# EAGLE board NanoLite_Panelize (EAGLE 6.3), part 1 of 2
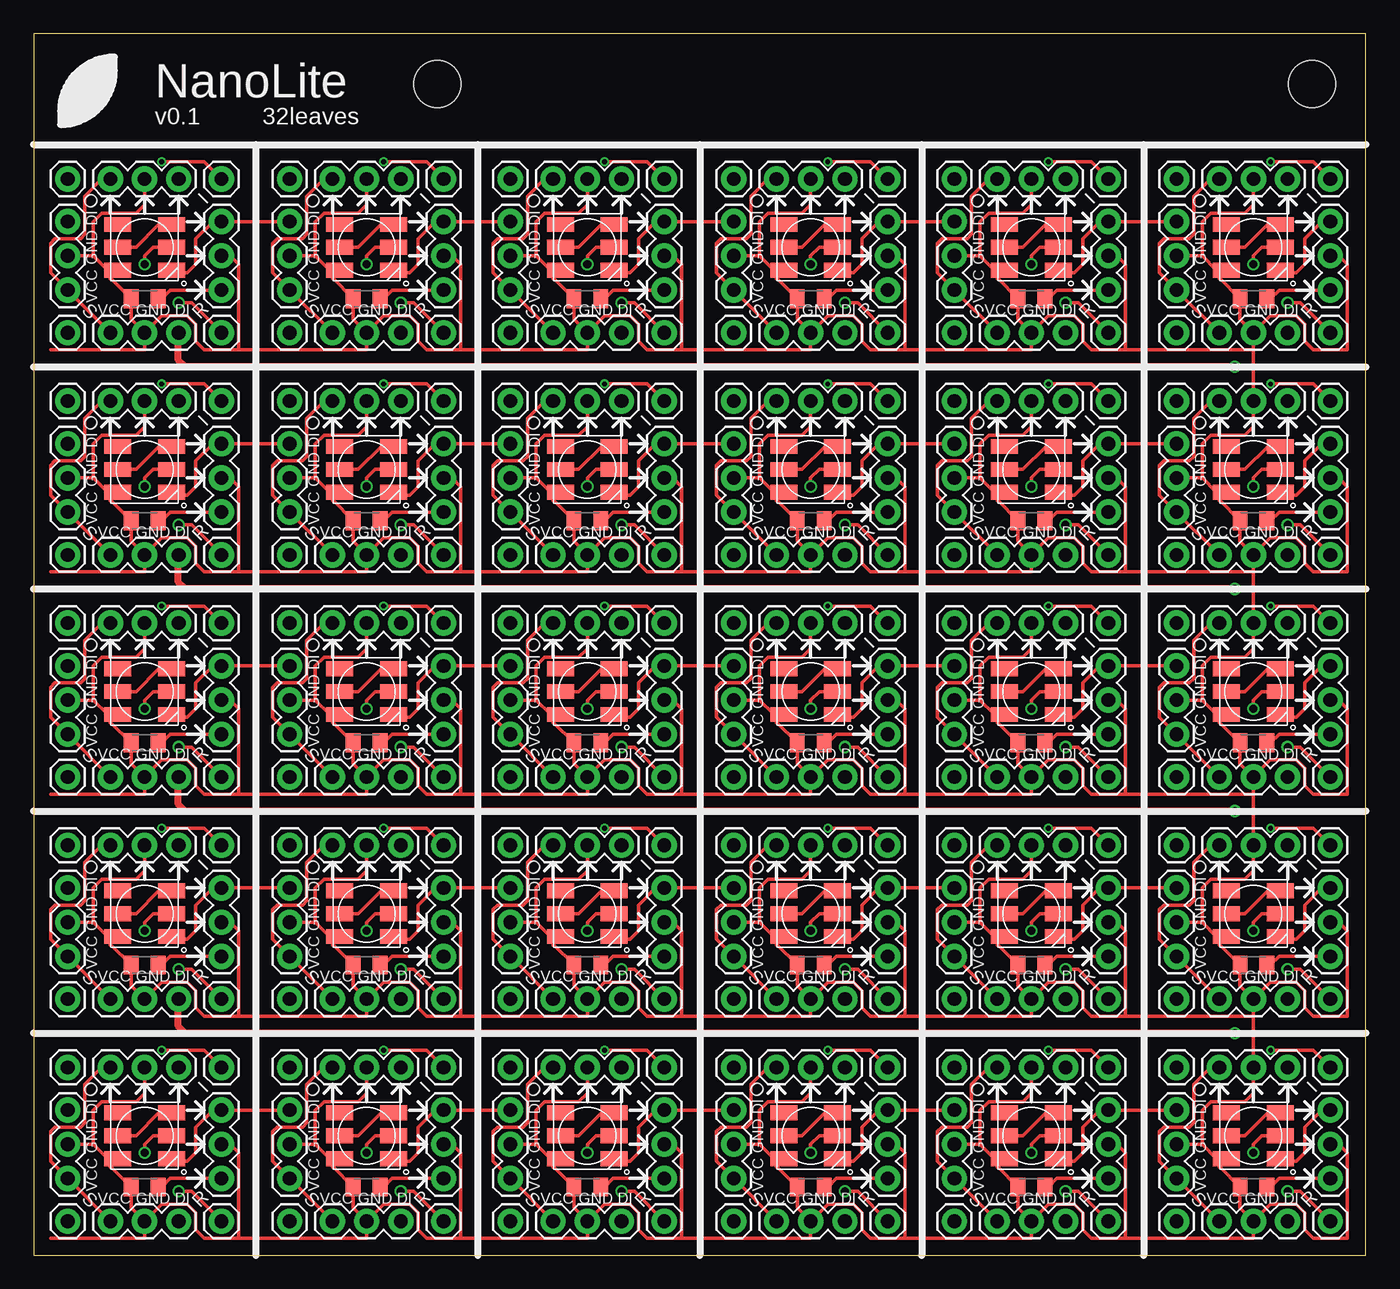
[diagram p0: board, top side]
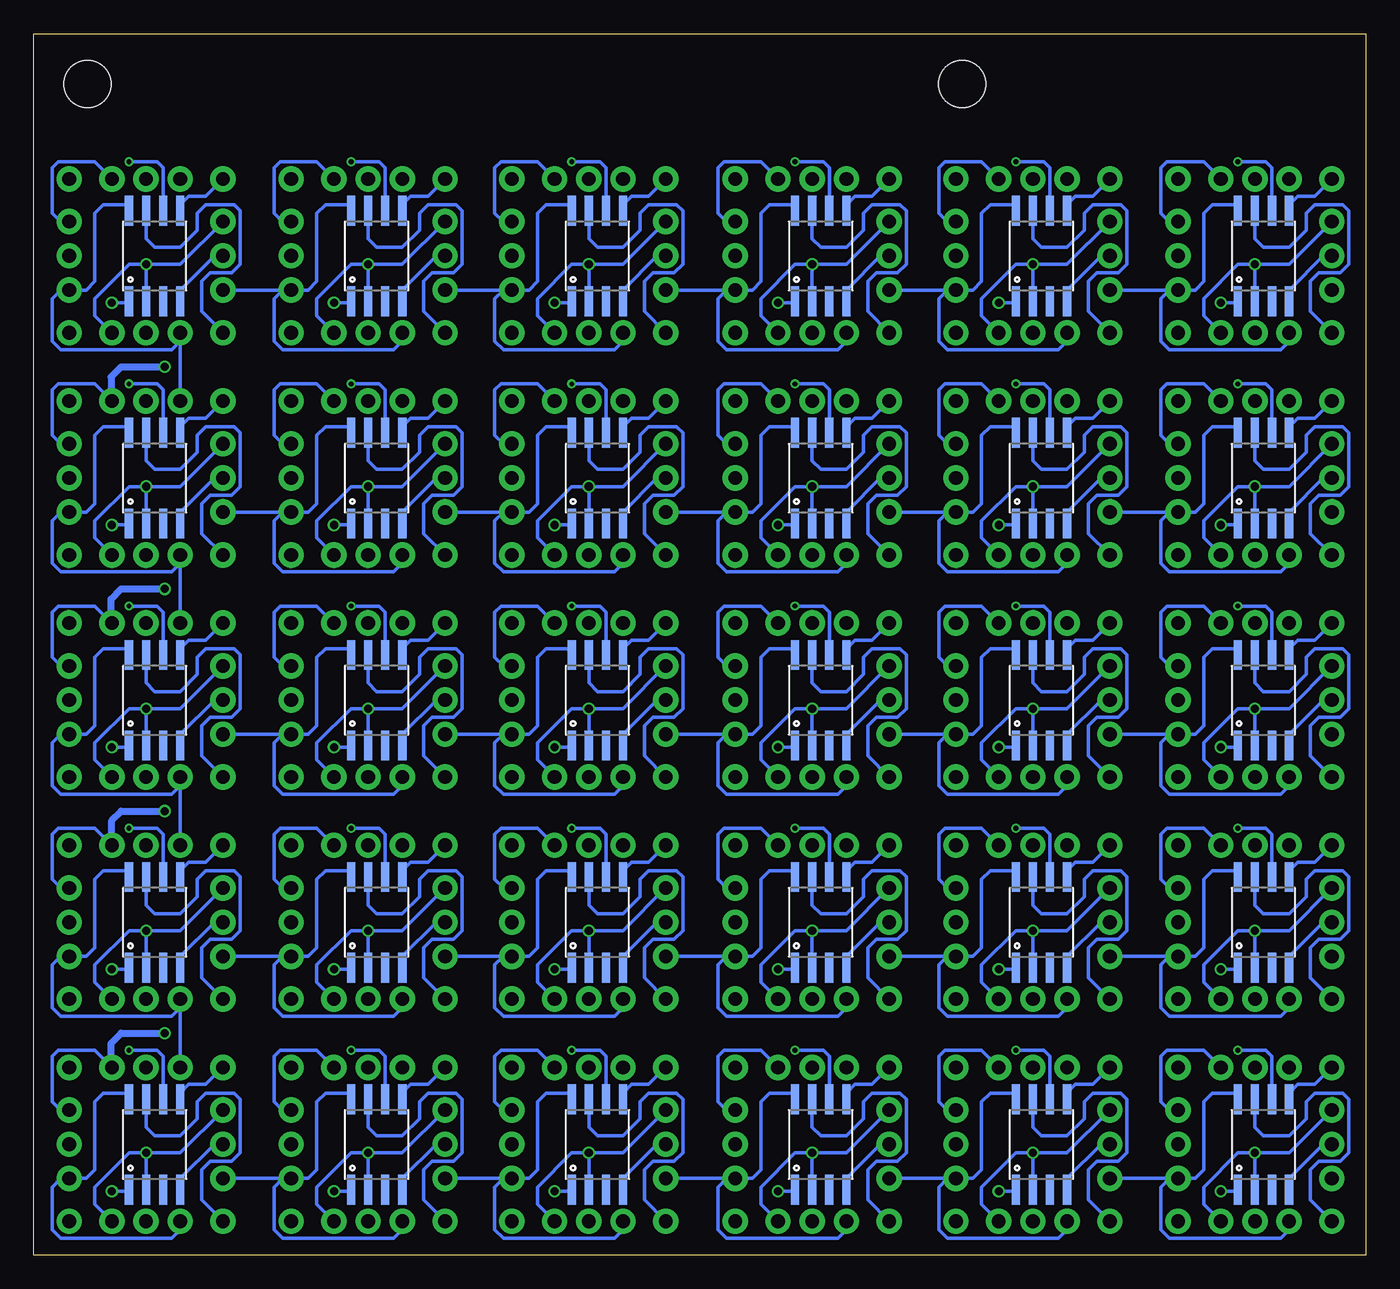
[diagram p1: board, bottom side, seen from below]

Size 99 x 90.75 mm. Coordinates in mm from the lower left corner, seen from the top.
Outline: 0,0 99,0 99,90.75 0,90.75 0,0
Copper layers (1*2*15*16): Top 0.035mm / dielectric 0.2mm / layer 2 0.0175mm / dielectric 1.1mm / layer 15 0.0175mm / dielectric 0.2mm / Bottom 0.035mm
Design rules "SeeedStudio_DRU_no_angle_20130527": minimum track width 6mil, minimum drill 12mil, track to track 6mil, track to pad 6mil, pad to pad 6mil, via to via 6mil, smd to smd 0mil, copper to edge 10mil, drill to drill 10mil, minimum pad ring 6mil, minimum via ring 6mil, stop-mask expansion 2mil, vias tented up to drill 25mil, thermal gap 10mil
Holes 3.5 mm at 95,87 30,87

## Footprints (pad centres in the part's own frame; a part is rotated, then mirrored left to right if it is on the bottom)
1X03 = drill 1.016 pad 1.88: 1 0,0; 2 2.54,0; 3 5.08,0
C0805K = smd 1.1 x 1.4: 1 -1,0; 2 1,0
WS28115050 = smd 2 x 1.1: DI 2,0; DO 2,-1.7; LEDVDD -2,0; NC -2,1.7; VDD 2,1.7; VSS -2,-1.7
1X01 = drill 1.016 pad 1.88: 1 0,0
SO08-EIAJ = smd 0.61 x 2.21: 1 -1.905,-3.378; 2 -0.635,-3.378; 3 0.635,-3.378; 4 1.905,-3.378; 5 1.905,3.353; 6 0.635,3.353; 7 -0.635,3.353; 8 -1.905,3.353

## Placement (x,y rotation side)
BOT  [1X03]  5.71,2.53 0 top
BOT1  [1X03]  22.2,2.53 0 top
BOT2  [1X03]  38.6,2.53 0 top
BOT3  [1X03]  55.2,2.53 0 top
BOT4  [1X03]  71.61,2.53 0 top
BOT5  [1X03]  88.11,2.53 0 top
BOT6  [1X03]  5.71,19.03 0 top
BOT7  [1X03]  22.2,19.03 0 top
BOT8  [1X03]  38.6,19.03 0 top
BOT9  [1X03]  55.2,19.03 0 top
BOT10  [1X03]  71.61,19.03 0 top
BOT11  [1X03]  88.11,19.03 0 top
BOT12  [1X03]  5.71,35.53 0 top
BOT13  [1X03]  22.2,35.53 0 top
BOT14  [1X03]  38.6,35.53 0 top
BOT15  [1X03]  55.2,35.53 0 top
BOT16  [1X03]  71.61,35.53 0 top
BOT17  [1X03]  88.11,35.53 0 top
BOT18  [1X03]  5.71,52.03 0 top
BOT19  [1X03]  22.2,52.03 0 top
BOT20  [1X03]  38.6,52.03 0 top
BOT21  [1X03]  55.2,52.03 0 top
BOT22  [1X03]  71.61,52.03 0 top
BOT23  [1X03]  88.11,52.03 0 top
BOT24  [1X03]  5.71,68.53 0 top
BOT25  [1X03]  22.2,68.53 0 top
BOT26  [1X03]  38.6,68.53 0 top
BOT27  [1X03]  55.2,68.53 0 top
BOT28  [1X03]  71.61,68.53 0 top
BOT29  [1X03]  88.11,68.53 0 top
C1  10uF  [C0805K]  8.24,5.07 180 top
C2  10uF  [C0805K]  24.75,5.07 180 top
C3  10uF  [C0805K]  41.15,5.07 180 top
C4  10uF  [C0805K]  57.74,5.07 180 top
C5  10uF  [C0805K]  74.14,5.07 180 top
C6  10uF  [C0805K]  90.64,5.07 180 top
C7  10uF  [C0805K]  8.24,21.57 180 top
C8  10uF  [C0805K]  24.75,21.57 180 top
C9  10uF  [C0805K]  41.15,21.57 180 top
C10  10uF  [C0805K]  57.74,21.57 180 top
C11  10uF  [C0805K]  74.14,21.57 180 top
C12  10uF  [C0805K]  90.64,21.57 180 top
C13  10uF  [C0805K]  8.24,38.07 180 top
C14  10uF  [C0805K]  24.75,38.07 180 top
C15  10uF  [C0805K]  41.15,38.07 180 top
C16  10uF  [C0805K]  57.74,38.07 180 top
C17  10uF  [C0805K]  74.14,38.07 180 top
C18  10uF  [C0805K]  90.64,38.07 180 top
C19  10uF  [C0805K]  8.24,54.57 180 top
C20  10uF  [C0805K]  24.75,54.57 180 top
C21  10uF  [C0805K]  41.15,54.57 180 top
C22  10uF  [C0805K]  57.74,54.57 180 top
C23  10uF  [C0805K]  74.14,54.57 180 top
C24  10uF  [C0805K]  90.64,54.57 180 top
C25  10uF  [C0805K]  8.24,71.07 180 top
C26  10uF  [C0805K]  24.75,71.07 180 top
C27  10uF  [C0805K]  41.15,71.07 180 top
C28  10uF  [C0805K]  57.74,71.07 180 top
C29  10uF  [C0805K]  74.14,71.07 180 top
C30  10uF  [C0805K]  90.64,71.07 180 top
LED1  WS28115050  [WS28115050]  8.24,8.88 0 top
LED2  WS28115050  [WS28115050]  24.75,8.88 0 top
LED3  WS28115050  [WS28115050]  41.15,8.88 0 top
LED4  WS28115050  [WS28115050]  57.74,8.88 0 top
LED5  WS28115050  [WS28115050]  74.14,8.88 0 top
LED6  WS28115050  [WS28115050]  90.64,8.88 0 top
LED7  WS28115050  [WS28115050]  8.24,25.38 0 top
LED8  WS28115050  [WS28115050]  24.75,25.38 0 top
LED9  WS28115050  [WS28115050]  41.15,25.38 0 top
LED10  WS28115050  [WS28115050]  57.74,25.38 0 top
LED11  WS28115050  [WS28115050]  74.14,25.38 0 top
LED12  WS28115050  [WS28115050]  90.64,25.38 0 top
LED13  WS28115050  [WS28115050]  8.24,41.88 0 top
LED14  WS28115050  [WS28115050]  24.75,41.88 0 top
LED15  WS28115050  [WS28115050]  41.15,41.88 0 top
LED16  WS28115050  [WS28115050]  57.74,41.88 0 top
LED17  WS28115050  [WS28115050]  74.14,41.88 0 top
LED18  WS28115050  [WS28115050]  90.64,41.88 0 top
LED19  WS28115050  [WS28115050]  8.24,58.38 0 top
LED20  WS28115050  [WS28115050]  24.75,58.38 0 top
LED21  WS28115050  [WS28115050]  41.15,58.38 0 top
LED22  WS28115050  [WS28115050]  57.74,58.38 0 top
LED23  WS28115050  [WS28115050]  74.14,58.38 0 top
LED24  WS28115050  [WS28115050]  90.64,58.38 0 top
LED25  WS28115050  [WS28115050]  8.24,74.88 0 top
LED26  WS28115050  [WS28115050]  24.75,74.88 0 top
LED27  WS28115050  [WS28115050]  41.15,74.88 0 top
LED28  WS28115050  [WS28115050]  57.74,74.88 0 top
LED29  WS28115050  [WS28115050]  74.14,74.88 0 top
LED30  WS28115050  [WS28115050]  90.64,74.88 0 top
LEFT  [1X03]  2.53,5.71 90 top
LEFT1  [1X03]  19.03,5.71 90 top
LEFT2  [1X03]  35.43,5.71 90 top
LEFT3  [1X03]  52.03,5.71 90 top
LEFT4  [1X03]  68.43,5.71 90 top
LEFT5  [1X03]  84.93,5.71 90 top
LEFT6  [1X03]  2.53,22.2 90 top
LEFT7  [1X03]  19.03,22.2 90 top
LEFT8  [1X03]  35.43,22.2 90 top
LEFT9  [1X03]  52.03,22.2 90 top
LEFT10  [1X03]  68.43,22.2 90 top
LEFT11  [1X03]  84.93,22.2 90 top
LEFT12  [1X03]  2.53,38.7 90 top
LEFT13  [1X03]  19.03,38.7 90 top
LEFT14  [1X03]  35.43,38.7 90 top
LEFT15  [1X03]  52.03,38.7 90 top
LEFT16  [1X03]  68.43,38.7 90 top
LEFT17  [1X03]  84.93,38.7 90 top
LEFT18  [1X03]  2.53,55.2 90 top
LEFT19  [1X03]  19.03,55.2 90 top
LEFT20  [1X03]  35.43,55.2 90 top
LEFT21  [1X03]  52.03,55.2 90 top
LEFT22  [1X03]  68.43,55.2 90 top
LEFT23  [1X03]  84.93,55.2 90 top
LEFT24  [1X03]  2.53,71.7 90 top
LEFT25  [1X03]  19.03,71.7 90 top
LEFT26  [1X03]  35.43,71.7 90 top
LEFT27  [1X03]  52.03,71.7 90 top
LEFT28  [1X03]  68.43,71.7 90 top
LEFT29  [1X03]  84.93,71.7 90 top
MI  M01PTH  [1X01]  13.96,13.96 0 top
MI1  M01PTH  [1X01]  30.46,13.96 0 top
MI2  M01PTH  [1X01]  46.86,13.96 0 top
MI3  M01PTH  [1X01]  63.46,13.96 0 top
MI4  M01PTH  [1X01]  79.86,13.96 0 top
MI5  M01PTH  [1X01]  96.36,13.96 0 top
MI6  M01PTH  [1X01]  13.96,30.46 0 top
MI7  M01PTH  [1X01]  30.46,30.46 0 top
MI8  M01PTH  [1X01]  46.86,30.46 0 top
MI9  M01PTH  [1X01]  63.46,30.46 0 top
MI10  M01PTH  [1X01]  79.86,30.46 0 top
MI11  M01PTH  [1X01]  96.36,30.46 0 top
MI12  M01PTH  [1X01]  13.96,46.96 0 top
MI13  M01PTH  [1X01]  30.46,46.96 0 top
MI14  M01PTH  [1X01]  46.86,46.96 0 top
MI15  M01PTH  [1X01]  63.46,46.96 0 top
MI16  M01PTH  [1X01]  79.86,46.96 0 top
MI17  M01PTH  [1X01]  96.36,46.96 0 top
MI18  M01PTH  [1X01]  13.96,63.46 0 top
MI19  M01PTH  [1X01]  30.46,63.46 0 top
MI20  M01PTH  [1X01]  46.86,63.46 0 top
MI21  M01PTH  [1X01]  63.46,63.46 0 top
MI22  M01PTH  [1X01]  79.86,63.46 0 top
MI23  M01PTH  [1X01]  96.36,63.46 0 top
MI24  M01PTH  [1X01]  13.96,79.96 0 top
MI25  M01PTH  [1X01]  30.46,79.96 0 top
MI26  M01PTH  [1X01]  46.86,79.96 0 top
MI27  M01PTH  [1X01]  63.46,79.96 0 top
MI28  M01PTH  [1X01]  79.86,79.96 0 top
MI29  M01PTH  [1X01]  96.36,79.96 0 top
MO  M01PTH  [1X01]  2.53,13.96 0 top
MO1  M01PTH  [1X01]  19.03,13.96 0 top
MO2  M01PTH  [1X01]  35.43,13.96 0 top
MO3  M01PTH  [1X01]  52.03,13.96 0 top
MO4  M01PTH  [1X01]  68.43,13.96 0 top
MO5  M01PTH  [1X01]  84.93,13.96 0 top
MO6  M01PTH  [1X01]  2.53,30.46 0 top
MO7  M01PTH  [1X01]  19.03,30.46 0 top
MO8  M01PTH  [1X01]  35.43,30.46 0 top
MO9  M01PTH  [1X01]  52.03,30.46 0 top
MO10  M01PTH  [1X01]  68.43,30.46 0 top
MO11  M01PTH  [1X01]  84.93,30.46 0 top
MO12  M01PTH  [1X01]  2.53,46.96 0 top
MO13  M01PTH  [1X01]  19.03,46.96 0 top
MO14  M01PTH  [1X01]  35.43,46.96 0 top
MO15  M01PTH  [1X01]  52.03,46.96 0 top
MO16  M01PTH  [1X01]  68.43,46.96 0 top
MO17  M01PTH  [1X01]  84.93,46.96 0 top
MO18  M01PTH  [1X01]  2.53,63.46 0 top
MO19  M01PTH  [1X01]  19.03,63.46 0 top
MO20  M01PTH  [1X01]  35.43,63.46 0 top
MO21  M01PTH  [1X01]  52.03,63.46 0 top
MO22  M01PTH  [1X01]  68.43,63.46 0 top
MO23  M01PTH  [1X01]  84.93,63.46 0 top
MO24  M01PTH  [1X01]  2.53,79.96 0 top
MO25  M01PTH  [1X01]  19.03,79.96 0 top
MO26  M01PTH  [1X01]  35.43,79.96 0 top
MO27  M01PTH  [1X01]  52.03,79.96 0 top
MO28  M01PTH  [1X01]  68.43,79.96 0 top
MO29  M01PTH  [1X01]  84.93,79.96 0 top
RIGHT  [1X03]  13.96,5.71 90 top
RIGHT1  [1X03]  30.46,5.71 90 top
RIGHT2  [1X03]  46.86,5.71 90 top
RIGHT3  [1X03]  63.46,5.71 90 top
RIGHT4  [1X03]  79.86,5.71 90 top
RIGHT5  [1X03]  96.36,5.71 90 top
RIGHT6  [1X03]  13.96,22.2 90 top
RIGHT7  [1X03]  30.46,22.2 90 top
RIGHT8  [1X03]  46.86,22.2 90 top
RIGHT9  [1X03]  63.46,22.2 90 top
RIGHT10  [1X03]  79.86,22.2 90 top
RIGHT11  [1X03]  96.36,22.2 90 top
RIGHT12  [1X03]  13.96,38.7 90 top
RIGHT13  [1X03]  30.46,38.7 90 top
RIGHT14  [1X03]  46.86,38.7 90 top
RIGHT15  [1X03]  63.46,38.7 90 top
RIGHT16  [1X03]  79.86,38.7 90 top
RIGHT17  [1X03]  96.36,38.7 90 top
RIGHT18  [1X03]  13.96,55.2 90 top
RIGHT19  [1X03]  30.46,55.2 90 top
RIGHT20  [1X03]  46.86,55.2 90 top
RIGHT21  [1X03]  63.46,55.2 90 top
RIGHT22  [1X03]  79.86,55.2 90 top
RIGHT23  [1X03]  96.36,55.2 90 top
RIGHT24  [1X03]  13.96,71.7 90 top
RIGHT25  [1X03]  30.46,71.7 90 top
RIGHT26  [1X03]  46.86,71.7 90 top
RIGHT27  [1X03]  63.46,71.7 90 top
RIGHT28  [1X03]  79.86,71.7 90 top
RIGHT29  [1X03]  96.36,71.7 90 top
RST  M01PTH  [1X01]  13.96,2.53 0 top
RST1  M01PTH  [1X01]  30.46,2.53 0 top
RST2  M01PTH  [1X01]  46.86,2.53 0 top
RST3  M01PTH  [1X01]  63.46,2.53 0 top
RST4  M01PTH  [1X01]  79.86,2.53 0 top
RST5  M01PTH  [1X01]  96.36,2.53 0 top
RST6  M01PTH  [1X01]  13.96,19.03 0 top
RST7  M01PTH  [1X01]  30.46,19.03 0 top
RST8  M01PTH  [1X01]  46.86,19.03 0 top
RST9  M01PTH  [1X01]  63.46,19.03 0 top
RST10  M01PTH  [1X01]  79.86,19.03 0 top
RST11  M01PTH  [1X01]  96.36,19.03 0 top
RST12  M01PTH  [1X01]  13.96,35.53 0 top
RST13  M01PTH  [1X01]  30.46,35.53 0 top
RST14  M01PTH  [1X01]  46.86,35.53 0 top
RST15  M01PTH  [1X01]  63.46,35.53 0 top
RST16  M01PTH  [1X01]  79.86,35.53 0 top
RST17  M01PTH  [1X01]  96.36,35.53 0 top
RST18  M01PTH  [1X01]  13.96,52.03 0 top
RST19  M01PTH  [1X01]  30.46,52.03 0 top
RST20  M01PTH  [1X01]  46.86,52.03 0 top
RST21  M01PTH  [1X01]  63.46,52.03 0 top
RST22  M01PTH  [1X01]  79.86,52.03 0 top
RST23  M01PTH  [1X01]  96.36,52.03 0 top
RST24  M01PTH  [1X01]  13.96,68.53 0 top
RST25  M01PTH  [1X01]  30.46,68.53 0 top
RST26  M01PTH  [1X01]  46.86,68.53 0 top
RST27  M01PTH  [1X01]  63.46,68.53 0 top
RST28  M01PTH  [1X01]  79.86,68.53 0 top
RST29  M01PTH  [1X01]  96.36,68.53 0 top
SCK  M01PTH  [1X01]  2.53,2.53 0 top
SCK1  M01PTH  [1X01]  19.03,2.53 0 top
SCK2  M01PTH  [1X01]  35.43,2.53 0 top
SCK3  M01PTH  [1X01]  52.03,2.53 0 top
SCK4  M01PTH  [1X01]  68.43,2.53 0 top
SCK5  M01PTH  [1X01]  84.93,2.53 0 top
SCK6  M01PTH  [1X01]  2.53,19.03 0 top
SCK7  M01PTH  [1X01]  19.03,19.03 0 top
SCK8  M01PTH  [1X01]  35.43,19.03 0 top
SCK9  M01PTH  [1X01]  52.03,19.03 0 top
SCK10  M01PTH  [1X01]  68.43,19.03 0 top
SCK11  M01PTH  [1X01]  84.93,19.03 0 top
SCK12  M01PTH  [1X01]  2.53,35.53 0 top
SCK13  M01PTH  [1X01]  19.03,35.53 0 top
SCK14  M01PTH  [1X01]  35.43,35.53 0 top
SCK15  M01PTH  [1X01]  52.03,35.53 0 top
SCK16  M01PTH  [1X01]  68.43,35.53 0 top
SCK17  M01PTH  [1X01]  84.93,35.53 0 top
SCK18  M01PTH  [1X01]  2.53,52.03 0 top
SCK19  M01PTH  [1X01]  19.03,52.03 0 top
SCK20  M01PTH  [1X01]  35.43,52.03 0 top
SCK21  M01PTH  [1X01]  52.03,52.03 0 top
SCK22  M01PTH  [1X01]  68.43,52.03 0 top
SCK23  M01PTH  [1X01]  84.93,52.03 0 top
SCK24  M01PTH  [1X01]  2.53,68.53 0 top
SCK25  M01PTH  [1X01]  19.03,68.53 0 top
SCK26  M01PTH  [1X01]  35.43,68.53 0 top
SCK27  M01PTH  [1X01]  52.03,68.53 0 top
SCK28  M01PTH  [1X01]  68.43,68.53 0 top
SCK29  M01PTH  [1X01]  84.93,68.53 0 top
TOP  [1X03]  5.71,13.96 0 top
TOP1  [1X03]  22.2,13.96 0 top
TOP2  [1X03]  38.6,13.96 0 top
TOP3  [1X03]  55.2,13.96 0 top
TOP4  [1X03]  71.61,13.96 0 top
TOP5  [1X03]  88.11,13.96 0 top
TOP6  [1X03]  5.71,30.46 0 top
TOP7  [1X03]  22.2,30.46 0 top
TOP8  [1X03]  38.6,30.46 0 top
TOP9  [1X03]  55.2,30.46 0 top
TOP10  [1X03]  71.61,30.46 0 top
TOP11  [1X03]  88.11,30.46 0 top
TOP12  [1X03]  5.71,46.96 0 top
TOP13  [1X03]  22.2,46.96 0 top
TOP14  [1X03]  38.6,46.96 0 top
TOP15  [1X03]  55.2,46.96 0 top
TOP16  [1X03]  71.61,46.96 0 top
TOP17  [1X03]  88.11,46.96 0 top
TOP18  [1X03]  5.71,63.46 0 top
TOP19  [1X03]  22.2,63.46 0 top
TOP20  [1X03]  38.6,63.46 0 top
TOP21  [1X03]  55.2,63.46 0 top
TOP22  [1X03]  71.61,63.46 0 top
TOP23  [1X03]  88.11,63.46 0 top
TOP24  [1X03]  5.71,79.96 0 top
TOP25  [1X03]  22.2,79.96 0 top
TOP26  [1X03]  38.6,79.96 0 top
TOP27  [1X03]  55.2,79.96 0 top
TOP28  [1X03]  71.61,79.96 0 top
TOP29  [1X03]  88.11,79.96 0 top
U1  Tiny45-20-SMT  [SO08-EIAJ]  7.61,8.24 0 bottom
U2  Tiny45-20-SMT  [SO08-EIAJ]  24.11,8.24 0 bottom
U3  Tiny45-20-SMT  [SO08-EIAJ]  40.51,8.24 0 bottom
U4  Tiny45-20-SMT  [SO08-EIAJ]  57.11,8.24 0 bottom
U5  Tiny45-20-SMT  [SO08-EIAJ]  73.51,8.24 0 bottom
U6  Tiny45-20-SMT  [SO08-EIAJ]  90.01,8.24 0 bottom
U7  Tiny45-20-SMT  [SO08-EIAJ]  7.61,24.75 0 bottom
U8  Tiny45-20-SMT  [SO08-EIAJ]  24.11,24.75 0 bottom
U9  Tiny45-20-SMT  [SO08-EIAJ]  40.51,24.75 0 bottom
U10  Tiny45-20-SMT  [SO08-EIAJ]  57.11,24.75 0 bottom
U11  Tiny45-20-SMT  [SO08-EIAJ]  73.51,24.75 0 bottom
U12  Tiny45-20-SMT  [SO08-EIAJ]  90.01,24.75 0 bottom
U13  Tiny45-20-SMT  [SO08-EIAJ]  7.61,41.24 0 bottom
U14  Tiny45-20-SMT  [SO08-EIAJ]  24.11,41.24 0 bottom
U15  Tiny45-20-SMT  [SO08-EIAJ]  40.51,41.24 0 bottom
U16  Tiny45-20-SMT  [SO08-EIAJ]  57.11,41.24 0 bottom
U17  Tiny45-20-SMT  [SO08-EIAJ]  73.51,41.24 0 bottom
U18  Tiny45-20-SMT  [SO08-EIAJ]  90.01,41.24 0 bottom
U19  Tiny45-20-SMT  [SO08-EIAJ]  7.61,57.74 0 bottom
U20  Tiny45-20-SMT  [SO08-EIAJ]  24.11,57.74 0 bottom
U21  Tiny45-20-SMT  [SO08-EIAJ]  40.51,57.74 0 bottom
U22  Tiny45-20-SMT  [SO08-EIAJ]  57.11,57.74 0 bottom
U23  Tiny45-20-SMT  [SO08-EIAJ]  73.51,57.74 0 bottom
U24  Tiny45-20-SMT  [SO08-EIAJ]  90.01,57.74 0 bottom
U25  Tiny45-20-SMT  [SO08-EIAJ]  7.61,74.25 0 bottom
U26  Tiny45-20-SMT  [SO08-EIAJ]  24.11,74.25 0 bottom
U27  Tiny45-20-SMT  [SO08-EIAJ]  40.51,74.25 0 bottom
U28  Tiny45-20-SMT  [SO08-EIAJ]  57.11,74.25 0 bottom
U29  Tiny45-20-SMT  [SO08-EIAJ]  73.51,74.25 0 bottom
U30  Tiny45-20-SMT  [SO08-EIAJ]  90.01,74.25 0 bottom

## Library data of the parts
BOT BOT1-BOT29 LEFT LEFT1-LEFT29 MI MI1-MI29 MO MO1-MO29 RIGHT RIGHT1-RIGHT29 RST RST1-RST29 SCK SCK1-SCK29 TOP TOP1-TOP29 = SparkFun-Connectors
C1-C30 = adafruit
LED1-LED30 = microbuilder
U1-U30 = SparkFun-DigitalIC; PROD_ID: IC-08922

## Nets
D1: U2.3
D2: U1.3
D3: U3.3
D4: U4.3
D5: U5.3
D6: U6.3
D7: U7.3
D8: U8.3
D9: U9.3
D10: U10.3
D11: U11.3
D12: U12.3
D13: U13.3
D14: U14.3
D15: U15.3
D16: U16.3
D17: U17.3
D18: U18.3
D19: U19.3
D20: U20.3
D21: U21.3
D22: U22.3
D23: U23.3
D24: U24.3
D25: U25.3
D26: U26.3
D27: U27.3
D28: U28.3
D29: U29.3
D30: U30.3
DI: BOT.3 LED1.DI LEFT.3 U1.2
DI1: BOT1.3 LED1.DO LED2.DI LEFT1.3 RIGHT.3 TOP.3 U2.2
DI2: BOT2.3 LED2.DO LED3.DI LEFT2.3 RIGHT1.3 TOP1.3 U3.2
DI3: BOT3.3 LED3.DO LED4.DI LEFT3.3 RIGHT2.3 TOP2.3 U4.2
DI4: BOT4.3 LED4.DO LED5.DI LEFT4.3 RIGHT3.3 TOP3.3 U5.2
DI5: BOT5.3 LED5.DO LED6.DI LEFT5.3 RIGHT4.3 TOP4.3 U6.2
DI6: BOT6.3 LED6.DO LED7.DI LEFT6.3 RIGHT5.3 TOP5.3 U7.2
DI7: BOT7.3 LED7.DO LED8.DI LEFT7.3 RIGHT6.3 TOP6.3 U8.2
DI8: BOT8.3 LED8.DO LED9.DI LEFT8.3 RIGHT7.3 TOP7.3 U9.2
DI9: BOT9.3 LED9.DO LED10.DI LEFT9.3 RIGHT8.3 TOP8.3 U10.2
DI10: BOT10.3 LED10.DO LED11.DI LEFT10.3 RIGHT9.3 TOP9.3 U11.2
DI11: BOT11.3 LED11.DO LED12.DI LEFT11.3 RIGHT10.3 TOP10.3 U12.2
DI12: BOT12.3 LED12.DO LED13.DI LEFT12.3 RIGHT11.3 TOP11.3 U13.2
DI13: BOT13.3 LED13.DO LED14.DI LEFT13.3 RIGHT12.3 TOP12.3 U14.2
DI14: BOT14.3 LED14.DO LED15.DI LEFT14.3 RIGHT13.3 TOP13.3 U15.2
DI15: BOT15.3 LED15.DO LED16.DI LEFT15.3 RIGHT14.3 TOP14.3 U16.2
DI16: BOT16.3 LED16.DO LED17.DI LEFT16.3 RIGHT15.3 TOP15.3 U17.2
DI17: BOT17.3 LED17.DO LED18.DI LEFT17.3 RIGHT16.3 TOP16.3 U18.2
DI18: BOT18.3 LED18.DO LED19.DI LEFT18.3 RIGHT17.3 TOP17.3 U19.2
DI19: BOT19.3 LED19.DO LED20.DI LEFT19.3 RIGHT18.3 TOP18.3 U20.2
DI20: BOT20.3 LED20.DO LED21.DI LEFT20.3 RIGHT19.3 TOP19.3 U21.2
DI21: BOT21.3 LED21.DO LED22.DI LEFT21.3 RIGHT20.3 TOP20.3 U22.2
DI22: BOT22.3 LED22.DO LED23.DI LEFT22.3 RIGHT21.3 TOP21.3 U23.2
DI23: BOT23.3 LED23.DO LED24.DI LEFT23.3 RIGHT22.3 TOP22.3 U24.2
DI24: BOT24.3 LED24.DO LED25.DI LEFT24.3 RIGHT23.3 TOP23.3 U25.2
DI25: BOT25.3 LED25.DO LED26.DI LEFT25.3 RIGHT24.3 TOP24.3 U26.2
DI26: BOT26.3 LED26.DO LED27.DI LEFT26.3 RIGHT25.3 TOP25.3 U27.2
DI27: BOT27.3 LED27.DO LED28.DI LEFT27.3 RIGHT26.3 TOP26.3 U28.2
DI28: BOT28.3 LED28.DO LED29.DI LEFT28.3 RIGHT27.3 TOP27.3 U29.2
DI29: BOT29.3 LED29.DO LED30.DI LEFT29.3 RIGHT28.3 TOP28.3 U30.2
DO1: LED30.DO RIGHT29.3 TOP29.3
GND: BOT1.2 BOT2.2 BOT3.2 BOT4.2 BOT5.2 BOT6.2 BOT7.2 BOT8.2 BOT9.2 BOT10.2 BOT11.2 BOT12.2 BOT13.2 BOT14.2 BOT15.2 BOT16.2 BOT17.2 BOT18.2 BOT19.2 BOT20.2 BOT21.2 BOT22.2 BOT23.2 BOT24.2 BOT25.2 BOT26.2 BOT27.2 BOT28.2 BOT29.2 BOT.2 C1.2 C2.2 C3.2 C4.2 C5.2 C6.2 C7.2 C8.2 C9.2 C10.2 C11.2 C12.2 C13.2 C14.2 C15.2 C16.2 C17.2 C18.2 C19.2 C20.2 C21.2 C22.2 C23.2 C24.2 C25.2 C26.2 C27.2 C28.2 C29.2 C30.2 LED1.VSS LED2.VSS LED3.VSS LED4.VSS LED5.VSS LED6.VSS LED7.VSS LED8.VSS LED9.VSS LED10.VSS LED11.VSS LED12.VSS LED13.VSS LED14.VSS LED15.VSS LED16.VSS LED17.VSS LED18.VSS LED19.VSS LED20.VSS LED21.VSS LED22.VSS LED23.VSS LED24.VSS LED25.VSS LED26.VSS LED27.VSS LED28.VSS LED29.VSS LED30.VSS LEFT1.2 LEFT2.2 LEFT3.2 LEFT4.2 LEFT5.2 LEFT6.2 LEFT7.2 LEFT8.2 LEFT9.2 LEFT10.2 LEFT11.2 LEFT12.2 LEFT13.2 LEFT14.2 LEFT15.2 LEFT16.2 LEFT17.2 LEFT18.2 LEFT19.2 LEFT20.2 LEFT21.2 LEFT22.2 LEFT23.2 LEFT24.2 LEFT25.2 LEFT26.2 LEFT27.2 LEFT28.2 LEFT29.2 LEFT.2 RIGHT1.2 RIGHT2.2 RIGHT3.2 RIGHT4.2 RIGHT5.2 RIGHT6.2 RIGHT7.2 RIGHT8.2 RIGHT9.2 RIGHT10.2 RIGHT11.2 RIGHT12.2 RIGHT13.2 RIGHT14.2 RIGHT15.2 RIGHT16.2 RIGHT17.2 RIGHT18.2 RIGHT19.2 RIGHT20.2 RIGHT21.2 RIGHT22.2 RIGHT23.2 RIGHT24.2 RIGHT25.2 RIGHT26.2 RIGHT27.2 RIGHT28.2 RIGHT29.2 RIGHT.2 TOP1.2 TOP2.2 TOP3.2 TOP4.2 TOP5.2 TOP6.2 TOP7.2 TOP8.2 TOP9.2 TOP10.2 TOP11.2 TOP12.2 TOP13.2 TOP14.2 TOP15.2 TOP16.2 TOP17.2 TOP18.2 TOP19.2 TOP20.2 TOP21.2 TOP22.2 TOP23.2 TOP24.2 TOP25.2 TOP26.2 TOP27.2 TOP28.2 TOP29.2 TOP.2 U1.4 U2.4 U3.4 U4.4 U5.4 U6.4 U7.4 U8.4 U9.4 U10.4 U11.4 U12.4 U13.4 U14.4 U15.4 U16.4 U17.4 U18.4 U19.4 U20.4 U21.4 U22.4 U23.4 U24.4 U25.4 U26.4 U27.4 U28.4 U29.4 U30.4
MI: MI.1 U1.6
MI1: MI1.1 U2.6
MI2: MI2.1 U3.6
MI3: MI3.1 U4.6
MI4: MI4.1 U5.6
MI5: MI5.1 U6.6
MI6: MI6.1 U7.6
MI7: MI7.1 U8.6
MI8: MI8.1 U9.6
MI9: MI9.1 U10.6
MI10: MI10.1 U11.6
MI11: MI11.1 U12.6
MI12: MI12.1 U13.6
MI13: MI13.1 U14.6
MI14: MI14.1 U15.6
MI15: MI15.1 U16.6
MI16: MI16.1 U17.6
MI17: MI17.1 U18.6
MI18: MI18.1 U19.6
MI19: MI19.1 U20.6
MI20: MI20.1 U21.6
MI21: MI21.1 U22.6
MI22: MI22.1 U23.6
MI23: MI23.1 U24.6
MI24: MI24.1 U25.6
MI25: MI25.1 U26.6
MI26: MI26.1 U27.6
MI27: MI27.1 U28.6
MI28: MI28.1 U29.6
MI29: MI29.1 U30.6
MO: MO.1 U1.5
MO1: MO1.1 U2.5
MO2: MO2.1 U3.5
MO3: MO3.1 U4.5
MO4: MO4.1 U5.5
MO5: MO5.1 U6.5
MO6: MO6.1 U7.5
MO7: MO7.1 U8.5
MO8: MO8.1 U9.5
MO9: MO9.1 U10.5
MO10: MO10.1 U11.5
MO11: MO11.1 U12.5
MO12: MO12.1 U13.5
MO13: MO13.1 U14.5
MO14: MO14.1 U15.5
MO15: MO15.1 U16.5
MO16: MO16.1 U17.5
MO17: MO17.1 U18.5
MO18: MO18.1 U19.5
MO19: MO19.1 U20.5
MO20: MO20.1 U21.5
MO21: MO21.1 U22.5
MO22: MO22.1 U23.5
MO23: MO23.1 U24.5
MO24: MO24.1 U25.5
MO25: MO25.1 U26.5
MO26: MO26.1 U27.5
MO27: MO27.1 U28.5
MO28: MO28.1 U29.5
MO29: MO29.1 U30.5
N$1: LED1.LEDVDD LED1.VDD
N$2: LED2.LEDVDD LED2.VDD
N$3: LED3.LEDVDD LED3.VDD
N$4: LED4.LEDVDD LED4.VDD
N$5: LED5.LEDVDD LED5.VDD
N$6: LED6.LEDVDD LED6.VDD
N$7: LED7.LEDVDD LED7.VDD
N$8: LED8.LEDVDD LED8.VDD
N$9: LED9.LEDVDD LED9.VDD
N$10: LED10.LEDVDD LED10.VDD
N$11: LED11.LEDVDD LED11.VDD
N$12: LED12.LEDVDD LED12.VDD
N$13: LED13.LEDVDD LED13.VDD
N$14: LED14.LEDVDD LED14.VDD
N$15: LED15.LEDVDD LED15.VDD
N$16: LED16.LEDVDD LED16.VDD
N$17: LED17.LEDVDD LED17.VDD
N$18: LED18.LEDVDD LED18.VDD
N$19: LED19.LEDVDD LED19.VDD
N$20: LED20.LEDVDD LED20.VDD
N$21: LED21.LEDVDD LED21.VDD
N$22: LED22.LEDVDD LED22.VDD
N$23: LED23.LEDVDD LED23.VDD
N$24: LED24.LEDVDD LED24.VDD
N$25: LED25.LEDVDD LED25.VDD
N$26: LED26.LEDVDD LED26.VDD
N$27: LED27.LEDVDD LED27.VDD
N$28: LED28.LEDVDD LED28.VDD
N$29: LED29.LEDVDD LED29.VDD
N$30: LED30.LEDVDD LED30.VDD
RESET: RST.1 U1.1
RESET1: RST1.1 U2.1
RESET2: RST2.1 U3.1
RESET3: RST3.1 U4.1
RESET4: RST4.1 U5.1
RESET5: RST5.1 U6.1
RESET6: RST6.1 U7.1
RESET7: RST7.1 U8.1
RESET8: RST8.1 U9.1
RESET9: RST9.1 U10.1
RESET10: RST10.1 U11.1
RESET11: RST11.1 U12.1
RESET12: RST12.1 U13.1
RESET13: RST13.1 U14.1
RESET14: RST14.1 U15.1
RESET15: RST15.1 U16.1
RESET16: RST16.1 U17.1
RESET17: RST17.1 U18.1
RESET18: RST18.1 U19.1
RESET19: RST19.1 U20.1
RESET20: RST20.1 U21.1
RESET21: RST21.1 U22.1
RESET22: RST22.1 U23.1
RESET23: RST23.1 U24.1
RESET24: RST24.1 U25.1
RESET25: RST25.1 U26.1
RESET26: RST26.1 U27.1
RESET27: RST27.1 U28.1
RESET28: RST28.1 U29.1
RESET29: RST29.1 U30.1
SCK: SCK.1 U1.7
SCK1: SCK1.1 U2.7
SCK2: SCK2.1 U3.7
SCK3: SCK3.1 U4.7
SCK4: SCK4.1 U5.7
SCK5: SCK5.1 U6.7
SCK6: SCK6.1 U7.7
SCK7: SCK7.1 U8.7
SCK8: SCK8.1 U9.7
SCK9: SCK9.1 U10.7
SCK10: SCK10.1 U11.7
SCK11: SCK11.1 U12.7
SCK12: SCK12.1 U13.7
SCK13: SCK13.1 U14.7
SCK14: SCK14.1 U15.7
SCK15: SCK15.1 U16.7
SCK16: SCK16.1 U17.7
SCK17: SCK17.1 U18.7
SCK18: SCK18.1 U19.7
SCK19: SCK19.1 U20.7
SCK20: SCK20.1 U21.7
SCK21: SCK21.1 U22.7
SCK22: SCK22.1 U23.7
SCK23: SCK23.1 U24.7
SCK24: SCK24.1 U25.7
SCK25: SCK25.1 U26.7
SCK26: SCK26.1 U27.7
SCK27: SCK27.1 U28.7
SCK28: SCK28.1 U29.7
SCK29: SCK29.1 U30.7
VCC: BOT1.1 BOT2.1 BOT3.1 BOT4.1 BOT5.1 BOT6.1 BOT7.1 BOT8.1 BOT9.1 BOT10.1 BOT11.1 BOT12.1 BOT13.1 BOT14.1 BOT15.1 BOT16.1 BOT17.1 BOT18.1 BOT19.1 BOT20.1 BOT21.1 BOT22.1 BOT23.1 BOT24.1 BOT25.1 BOT26.1 BOT27.1 BOT28.1 BOT29.1 BOT.1 C1.1 C2.1 C3.1 C4.1 C5.1 C6.1 C7.1 C8.1 C9.1 C10.1 C11.1 C12.1 C13.1 C14.1 C15.1 C16.1 C17.1 C18.1 C19.1 C20.1 C21.1 C22.1 C23.1 C24.1 C25.1 C26.1 C27.1 C28.1 C29.1 C30.1 LEFT1.1 LEFT2.1 LEFT3.1 LEFT4.1 LEFT5.1 LEFT6.1 LEFT7.1 LEFT8.1 LEFT9.1 LEFT10.1 LEFT11.1 LEFT12.1 LEFT13.1 LEFT14.1 LEFT15.1 LEFT16.1 LEFT17.1 LEFT18.1 LEFT19.1 LEFT20.1 LEFT21.1 LEFT22.1 LEFT23.1 LEFT24.1 LEFT25.1 LEFT26.1 LEFT27.1 LEFT28.1 LEFT29.1 LEFT.1 RIGHT1.1 RIGHT2.1 RIGHT3.1 RIGHT4.1 RIGHT5.1 RIGHT6.1 RIGHT7.1 RIGHT8.1 RIGHT9.1 RIGHT10.1 RIGHT11.1 RIGHT12.1 RIGHT13.1 RIGHT14.1 RIGHT15.1 RIGHT16.1 RIGHT17.1 RIGHT18.1 RIGHT19.1 RIGHT20.1 RIGHT21.1 RIGHT22.1 RIGHT23.1 RIGHT24.1 RIGHT25.1 RIGHT26.1 RIGHT27.1 RIGHT28.1 RIGHT29.1 RIGHT.1 TOP1.1 TOP2.1 TOP3.1 TOP4.1 TOP5.1 TOP6.1 TOP7.1 TOP8.1 TOP9.1 TOP10.1 TOP11.1 TOP12.1 TOP13.1 TOP14.1 TOP15.1 TOP16.1 TOP17.1 TOP18.1 TOP19.1 TOP20.1 TOP21.1 TOP22.1 TOP23.1 TOP24.1 TOP25.1 TOP26.1 TOP27.1 TOP28.1 TOP29.1 TOP.1 U1.8 U2.8 U3.8 U4.8 U5.8 U6.8 U7.8 U8.8 U9.8 U10.8 U11.8 U12.8 U13.8 U14.8 U15.8 U16.8 U17.8 U18.8 U19.8 U20.8 U21.8 U22.8 U23.8 U24.8 U25.8 U26.8 U27.8 U28.8 U29.8 U30.8

## Tracks (layer width: path | path; a pad name or v marks a point on that pad's centre or on a via)
DI  (via drill 0.6)
  Top 0.254: LED1.DI 8.88,8.88 8.24,8.24 v8.24,7.61
  Bottom 0.254: LEFT.3 5.71,7.61 v8.24,7.61 | U1.2 v8.24,7.61 | BOT.3 12.05,3.8 12.05,5.07 9.52,7.61 v8.24,7.61
DI1  (via drill 0.6)
  Top 0.254: LED2.DI 25.38,8.88 24.75,8.24 v24.75,7.61 | LED1.DO 10.45,6.97 11.42,6.97 12.05,7.61 12.05,9.52 13.32,10.79 RIGHT.3 LEFT1.3
  Bottom 0.254: LEFT1.3 22.2,7.61 v24.75,7.61 | U2.2 v24.75,7.61 | BOT1.3 28.55,3.8 28.55,5.07 26.02,7.61 v24.75,7.61 | TOP.3 12.05,15.23 14.78,15.23 15.23,14.78 15.23,11.42 14.6,10.79 RIGHT.3
DI2  (via drill 0.6)
  Top 0.254: LED3.DI 41.78,8.88 41.15,8.24 v41.15,7.61 | LEFT2.3 RIGHT1.3 29.82,10.79 28.55,9.52 28.55,7.61 27.92,6.97 26.95,6.97 LED2.DO
  Bottom 0.254: LEFT2.3 38.6,7.61 v41.15,7.61 | U3.2 v41.15,7.61 | BOT2.3 44.95,3.8 44.95,5.07 42.41,7.61 v41.15,7.61 | TOP1.3 28.55,15.23 31.28,15.23 31.73,14.78 31.73,11.42 31.09,10.79 RIGHT1.3
DI3  (via drill 0.6)
  Top 0.254: LED4.DI 58.38,8.88 57.74,8.24 v57.74,7.61 | LED3.DO 43.35,6.97 44.32,6.97 44.95,7.61 44.95,9.52 46.23,10.79 RIGHT2.3 LEFT3.3
  Bottom 0.254: LEFT3.3 55.2,7.61 v57.74,7.61 | U4.2 v57.74,7.61 | BOT3.3 61.55,3.8 61.55,5.07 59.02,7.61 v57.74,7.61 | TOP2.3 44.95,15.23 47.68,15.23 48.13,14.78 48.13,11.42 47.49,10.79 RIGHT2.3
DI4  (via drill 0.6)
  Top 0.254: LED5.DI 74.78,8.88 74.14,8.24 v74.14,7.61 | LEFT4.3 RIGHT3.3 62.83,10.79 61.55,9.52 61.55,7.61 60.92,6.97 59.95,6.97 LED4.DO
  Bottom 0.254: LEFT4.3 71.61,7.61 v74.14,7.61 | U5.2 v74.14,7.61 | BOT4.3 77.95,3.8 77.95,5.07 75.42,7.61 v74.14,7.61 | TOP3.3 61.55,15.23 64.28,15.23 64.73,14.78 64.73,11.42 64.09,10.79 RIGHT3.3
DI5  (via drill 0.6)
  Top 0.254: LED6.DI 91.28,8.88 90.64,8.24 v90.64,7.61 | LED5.DO 76.35,6.97 77.32,6.97 77.95,7.61 77.95,9.52 79.22,10.79 RIGHT4.3 LEFT5.3
  Bottom 0.254: LEFT5.3 88.11,7.61 v90.64,7.61 | U6.2 v90.64,7.61 | BOT5.3 94.45,3.8 94.45,5.07 91.92,7.61 v90.64,7.61 | TOP4.3 77.95,15.23 80.68,15.23 81.13,14.78 81.13,11.42 80.5,10.79 RIGHT4.3
DI6  (via drill 0.6)
  Top 0.254: LED7.DI 8.88,25.38 8.24,24.75 v8.24,24.11 | RIGHT5.3 95.72,10.79 94.45,9.52 94.45,7.61 93.82,6.97 92.85,6.97 LED6.DO
  Top 0.508: v89.25,16.5 11.25,16.5 10.75,17 10.75,19 BOT6.3
  Bottom 0.254: LEFT6.3 5.71,24.11 v8.24,24.11 | U7.2 v8.24,24.11 | BOT6.3 12.05,20.3 12.05,21.57 9.52,24.11 v8.24,24.11 | RIGHT5.3 97,10.79 97.63,11.42 97.63,14.78 97.18,15.23 94.45,15.23 TOP5.3 93.25,14.03
  Bottom 0.508: 93.25,14.03 93.25,15.75 92.5,16.5 v89.25,16.5
DI7  (via drill 0.6)
  Top 0.254: LED8.DI 25.38,25.38 24.75,24.75 v24.75,24.11 | LED7.DO 10.45,23.48 11.42,23.48 12.05,24.11 12.05,26.02 13.32,27.29 RIGHT6.3 LEFT7.3
  Bottom 0.254: LEFT7.3 22.2,24.11 v24.75,24.11 | U8.2 v24.75,24.11 | BOT7.3 28.55,20.3 28.55,21.57 26.02,24.11 v24.75,24.11 | TOP6.3 12.05,31.73 14.78,31.73 15.23,31.28 15.23,27.92 14.6,27.29 RIGHT6.3
DI8  (via drill 0.6)
  Top 0.254: LED9.DI 41.78,25.38 41.15,24.75 v41.15,24.11 | LEFT8.3 RIGHT7.3 29.82,27.29 28.55,26.02 28.55,24.11 27.92,23.48 26.95,23.48 LED8.DO
  Bottom 0.254: LEFT8.3 38.6,24.11 v41.15,24.11 | U9.2 v41.15,24.11 | BOT8.3 44.95,20.3 44.95,21.57 42.41,24.11 v41.15,24.11 | TOP7.3 28.55,31.73 31.28,31.73 31.73,31.28 31.73,27.92 31.09,27.29 RIGHT7.3
DI9  (via drill 0.6)
  Top 0.254: LED10.DI 58.38,25.38 57.74,24.75 v57.74,24.11 | LED9.DO 43.35,23.48 44.32,23.48 44.95,24.11 44.95,26.02 46.23,27.29 RIGHT8.3 LEFT9.3
  Bottom 0.254: LEFT9.3 55.2,24.11 v57.74,24.11 | U10.2 v57.74,24.11 | BOT9.3 61.55,20.3 61.55,21.57 59.02,24.11 v57.74,24.11 | TOP8.3 44.95,31.73 47.68,31.73 48.13,31.28 48.13,27.92 47.49,27.29 RIGHT8.3
DI10  (via drill 0.6)
  Top 0.254: LED11.DI 74.78,25.38 74.14,24.75 v74.14,24.11 | LEFT10.3 RIGHT9.3 62.83,27.29 61.55,26.02 61.55,24.11 60.92,23.48 59.95,23.48 LED10.DO
  Bottom 0.254: LEFT10.3 71.61,24.11 v74.14,24.11 | U11.2 v74.14,24.11 | BOT10.3 77.95,20.3 77.95,21.57 75.42,24.11 v74.14,24.11 | TOP9.3 61.55,31.73 64.28,31.73 64.73,31.28 64.73,27.92 64.09,27.29 RIGHT9.3
DI11  (via drill 0.6)
  Top 0.254: LED12.DI 91.28,25.38 90.64,24.75 v90.64,24.11 | LED11.DO 76.35,23.48 77.32,23.48 77.95,24.11 77.95,26.02 79.22,27.29 RIGHT10.3 LEFT11.3
  Bottom 0.254: LEFT11.3 88.11,24.11 v90.64,24.11 | U12.2 v90.64,24.11 | BOT11.3 94.45,20.3 94.45,21.57 91.92,24.11 v90.64,24.11 | TOP10.3 77.95,31.73 80.68,31.73 81.13,31.28 81.13,27.92 80.5,27.29 RIGHT10.3
DI12  (via drill 0.6)
  Top 0.254: LED13.DI 8.88,41.88 8.24,41.24 v8.24,40.61 | RIGHT11.3 95.72,27.29 94.45,26.02 94.45,24.11 93.82,23.48 92.85,23.48 LED12.DO
  Top 0.508: v89.25,33 11.25,33 10.75,33.5 10.75,35.49 BOT12.3
  Bottom 0.254: LEFT12.3 5.71,40.61 v8.24,40.61 | U13.2 v8.24,40.61 | BOT12.3 12.05,36.8 12.05,38.07 9.52,40.61 v8.24,40.61 | TOP11.3 94.45,31.73 97.18,31.73 97.63,31.28 97.63,27.92 97,27.29 RIGHT11.3
  Bottom 0.508: TOP11.3 93.19,32.31 92.5,33 v89.25,33
DI13  (via drill 0.6)
  Top 0.254: LED14.DI 25.38,41.88 24.75,41.24 v24.75,40.61 | LED13.DO 10.45,39.98 11.42,39.98 12.05,40.61 12.05,42.52 13.32,43.78 RIGHT12.3 LEFT13.3
  Bottom 0.254: LEFT13.3 22.2,40.61 v24.75,40.61 | U14.2 v24.75,40.61 | BOT13.3 28.55,36.8 28.55,38.07 26.02,40.61 v24.75,40.61 | TOP12.3 12.05,48.23 14.78,48.23 15.23,47.78 15.23,44.42 14.6,43.78 RIGHT12.3
DI14  (via drill 0.6)
  Top 0.254: LED15.DI 41.78,41.88 41.15,41.24 v41.15,40.61 | LEFT14.3 RIGHT13.3 29.82,43.78 28.55,42.52 28.55,40.61 27.92,39.98 26.95,39.98 LED14.DO
  Bottom 0.254: LEFT14.3 38.6,40.61 v41.15,40.61 | U15.2 v41.15,40.61 | BOT14.3 44.95,36.8 44.95,38.07 42.41,40.61 v41.15,40.61 | TOP13.3 28.55,48.23 31.28,48.23 31.73,47.78 31.73,44.42 31.09,43.78 RIGHT13.3
DI15  (via drill 0.6)
  Top 0.254: LED16.DI 58.38,41.88 57.74,41.24 v57.74,40.61 | LED15.DO 43.35,39.98 44.32,39.98 44.95,40.61 44.95,42.52 46.23,43.78 RIGHT14.3 LEFT15.3
  Bottom 0.254: LEFT15.3 55.2,40.61 v57.74,40.61 | U16.2 v57.74,40.61 | BOT15.3 61.55,36.8 61.55,38.07 59.02,40.61 v57.74,40.61 | TOP14.3 44.95,48.23 47.68,48.23 48.13,47.78 48.13,44.42 47.49,43.78 RIGHT14.3
DI16  (via drill 0.6)
  Top 0.254: LED17.DI 74.78,41.88 74.14,41.24 v74.14,40.61 | LEFT16.3 RIGHT15.3 62.83,43.78 61.55,42.52 61.55,40.61 60.92,39.98 59.95,39.98 LED16.DO
  Bottom 0.254: LEFT16.3 71.61,40.61 v74.14,40.61 | U17.2 v74.14,40.61 | BOT16.3 77.95,36.8 77.95,38.07 75.42,40.61 v74.14,40.61 | TOP15.3 61.55,48.23 64.28,48.23 64.73,47.78 64.73,44.42 64.09,43.78 RIGHT15.3
DI17  (via drill 0.6)
  Top 0.254: LED18.DI 91.28,41.88 90.64,41.24 v90.64,40.61 | LED17.DO 76.35,39.98 77.32,39.98 77.95,40.61 77.95,42.52 79.22,43.78 RIGHT16.3 LEFT17.3
  Bottom 0.254: LEFT17.3 88.11,40.61 v90.64,40.61 | U18.2 v90.64,40.61 | BOT17.3 94.45,36.8 94.45,38.07 91.92,40.61 v90.64,40.61 | TOP16.3 77.95,48.23 80.68,48.23 81.13,47.78 81.13,44.42 80.5,43.78 RIGHT16.3
DI18  (via drill 0.6)
  Top 0.254: LED19.DI 8.88,58.38 8.24,57.74 v8.24,57.11 | RIGHT17.3 95.72,43.78 94.45,42.52 94.45,40.61 93.82,39.98 92.85,39.98 LED18.DO
  Top 0.508: v89.25,49.5 11.25,49.5 10.75,50 10.75,51.99 BOT18.3
  Bottom 0.254: LEFT18.3 5.71,57.11 v8.24,57.11 | U19.2 v8.24,57.11 | BOT18.3 12.05,53.3 12.05,54.57 9.52,57.11 v8.24,57.11 | RIGHT17.3 97,43.78 97.63,44.42 97.63,47.78 97.18,48.23 94.45,48.23 TOP17.3 93.25,47.02
  Bottom 0.508: 93.25,47.02 93.25,48.75 92.5,49.5 v89.25,49.5
DI19  (via drill 0.6)
  Top 0.254: LED20.DI 25.38,58.38 24.75,57.74 v24.75,57.11 | LED19.DO 10.45,56.48 11.42,56.48 12.05,57.11 12.05,59.02 13.32,60.28 RIGHT18.3 LEFT19.3
  Bottom 0.254: LEFT19.3 22.2,57.11 v24.75,57.11 | U20.2 v24.75,57.11 | BOT19.3 28.55,53.3 28.55,54.57 26.02,57.11 v24.75,57.11 | TOP18.3 12.05,64.73 14.78,64.73 15.23,64.28 15.23,60.92 14.6,60.28 RIGHT18.3
DI20  (via drill 0.6)
  Top 0.254: LED21.DI 41.78,58.38 41.15,57.74 v41.15,57.11 | LEFT20.3 RIGHT19.3 29.82,60.28 28.55,59.02 28.55,57.11 27.92,56.48 26.95,56.48 LED20.DO
  Bottom 0.254: LEFT20.3 38.6,57.11 v41.15,57.11 | U21.2 v41.15,57.11 | BOT20.3 44.95,53.3 44.95,54.57 42.41,57.11 v41.15,57.11 | TOP19.3 28.55,64.73 31.28,64.73 31.73,64.28 31.73,60.92 31.09,60.28 RIGHT19.3
DI21  (via drill 0.6)
  Top 0.254: LED22.DI 58.38,58.38 57.74,57.74 v57.74,57.11 | LED21.DO 43.35,56.48 44.32,56.48 44.95,57.11 44.95,59.02 46.23,60.28 RIGHT20.3 LEFT21.3
  Bottom 0.254: LEFT21.3 55.2,57.11 v57.74,57.11 | U22.2 v57.74,57.11 | BOT21.3 61.55,53.3 61.55,54.57 59.02,57.11 v57.74,57.11 | TOP20.3 44.95,64.73 47.68,64.73 48.13,64.28 48.13,60.92 47.49,60.28 RIGHT20.3
DI22  (via drill 0.6)
  Top 0.254: LED23.DI 74.78,58.38 74.14,57.74 v74.14,57.11 | LEFT22.3 RIGHT21.3 62.83,60.28 61.55,59.02 61.55,57.11 60.92,56.48 59.95,56.48 LED22.DO
  Bottom 0.254: LEFT22.3 71.61,57.11 v74.14,57.11 | U23.2 v74.14,57.11 | BOT22.3 77.95,53.3 77.95,54.57 75.42,57.11 v74.14,57.11 | TOP21.3 61.55,64.73 64.28,64.73 64.73,64.28 64.73,60.92 64.09,60.28 RIGHT21.3
DI23  (via drill 0.6)
  Top 0.254: LED24.DI 91.28,58.38 90.64,57.74 v90.64,57.11 | LED23.DO 76.35,56.48 77.32,56.48 77.95,57.11 77.95,59.02 79.22,60.28 RIGHT22.3 LEFT23.3
  Bottom 0.254: LEFT23.3 88.11,57.11 v90.64,57.11 | U24.2 v90.64,57.11 | BOT23.3 94.45,53.3 94.45,54.57 91.92,57.11 v90.64,57.11 | TOP22.3 77.95,64.73 80.68,64.73 81.13,64.28 81.13,60.92 80.5,60.28 RIGHT22.3
DI24  (via drill 0.6)
  Top 0.254: LED25.DI 8.88,74.88 8.24,74.25 v8.24,73.61 | RIGHT23.3 95.72,60.28 94.45,59.02 94.45,57.11 93.82,56.48 92.85,56.48 LED24.DO
  Top 0.508: v89.25,66 11.25,66 10.75,66.5 10.75,68.5 BOT24.3
  Bottom 0.254: LEFT24.3 5.71,73.61 v8.24,73.61 | U25.2 v8.24,73.61 | BOT24.3 12.05,69.8 12.05,71.07 9.52,73.61 v8.24,73.61 | TOP23.3 94.45,64.73 97.18,64.73 97.63,64.28 97.63,60.92 97,60.28 RIGHT23.3
  Bottom 0.508: v89.25,66 92.5,66 93.25,65.25 93.25,63.52 TOP23.3
DI25  (via drill 0.6)
  Top 0.254: LED26.DI 25.38,74.88 24.75,74.25 v24.75,73.61 | LED25.DO 10.45,72.97 11.42,72.97 12.05,73.61 12.05,75.52 13.32,76.78 RIGHT24.3 LEFT25.3
  Bottom 0.254: LEFT25.3 22.2,73.61 v24.75,73.61 | U26.2 v24.75,73.61 | BOT25.3 28.55,69.8 28.55,71.07 26.02,73.61 v24.75,73.61 | TOP24.3 12.05,81.23 14.78,81.23 15.23,80.78 15.23,77.42 14.6,76.78 RIGHT24.3
DI26  (via drill 0.6)
  Top 0.254: LED27.DI 41.78,74.88 41.15,74.25 v41.15,73.61 | LEFT26.3 RIGHT25.3 29.82,76.78 28.55,75.52 28.55,73.61 27.92,72.97 26.95,72.97 LED26.DO
  Bottom 0.254: LEFT26.3 38.6,73.61 v41.15,73.61 | U27.2 v41.15,73.61 | BOT26.3 44.95,69.8 44.95,71.07 42.41,73.61 v41.15,73.61 | TOP25.3 28.55,81.23 31.28,81.23 31.73,80.78 31.73,77.42 31.09,76.78 RIGHT25.3
DI27  (via drill 0.6)
  Top 0.254: LED28.DI 58.38,74.88 57.74,74.25 v57.74,73.61 | LED27.DO 43.35,72.97 44.32,72.97 44.95,73.61 44.95,75.52 46.23,76.78 RIGHT26.3 LEFT27.3
  Bottom 0.254: LEFT27.3 55.2,73.61 v57.74,73.61 | U28.2 v57.74,73.61 | BOT27.3 61.55,69.8 61.55,71.07 59.02,73.61 v57.74,73.61 | TOP26.3 44.95,81.23 47.68,81.23 48.13,80.78 48.13,77.42 47.49,76.78 RIGHT26.3
DI28  (via drill 0.6)
  Top 0.254: LED29.DI 74.78,74.88 74.14,74.25 v74.14,73.61 | LEFT28.3 RIGHT27.3 62.83,76.78 61.55,75.52 61.55,73.61 60.92,72.97 59.95,72.97 LED28.DO
  Bottom 0.254: LEFT28.3 71.61,73.61 v74.14,73.61 | U29.2 v74.14,73.61 | BOT28.3 77.95,69.8 77.95,71.07 75.42,73.61 v74.14,73.61 | TOP27.3 61.55,81.23 64.28,81.23 64.73,80.78 64.73,77.42 64.09,76.78 RIGHT27.3
DI29  (via drill 0.6)
  Top 0.254: LED30.DI 91.28,74.88 90.64,74.25 v90.64,73.61 | LED29.DO 76.35,72.97 77.32,72.97 77.95,73.61 77.95,75.52 79.22,76.78 RIGHT28.3 LEFT29.3
  Bottom 0.254: LEFT29.3 88.11,73.61 v90.64,73.61 | U30.2 v90.64,73.61 | BOT29.3 94.45,69.8 94.45,71.07 91.92,73.61 v90.64,73.61 | TOP28.3 77.95,81.23 80.68,81.23 81.13,80.78 81.13,77.42 80.5,76.78 RIGHT28.3
DO1
  Top 0.254: RIGHT29.3 95.72,76.78 94.45,75.52 94.45,73.61 93.82,72.97 92.85,72.97 LED30.DO
  Bottom 0.254: TOP29.3 94.45,81.23 97.18,81.23 97.63,80.78 97.63,77.42 97,76.78 RIGHT29.3
GND
  Top 0.25: 6.97,1.26 8.24,1.26 BOT.2 | 23.48,1.26 24.75,1.26 BOT1.2 | 39.88,1.26 41.15,1.26 BOT2.2 | 56.48,1.26 57.74,1.26 BOT3.2 | 72.88,1.26 74.14,1.26 BOT4.2 | 89.38,1.26 90.64,1.26 BOT5.2 | 23.48,17.76 24.75,17.76 BOT7.2 | 39.88,17.76 41.15,17.76 BOT8.2 | 56.48,17.76 57.74,17.76 BOT9.2 | 72.88,17.76 74.14,17.76 BOT10.2 | 89.38,17.76 90.64,17.76 BOT11.2 | 6.97,34.26 8.24,34.26 BOT12.2 | 23.48,34.26 24.75,34.26 BOT13.2 | 39.88,34.26 41.15,34.26 BOT14.2 | 56.48,34.26 57.74,34.26 BOT15.2 | 72.88,34.26 74.14,34.26 BOT16.2 | 89.38,34.26 90.64,34.26 BOT17.2 | 6.97,50.76 8.24,50.76 BOT18.2 | 23.48,50.76 24.75,50.76 BOT19.2 | 39.88,50.76 41.15,50.76 BOT20.2 | 56.48,50.76 57.74,50.76 BOT21.2 | 72.88,50.76 74.14,50.76 BOT22.2 | 89.38,50.76 90.64,50.76 BOT23.2 | 6.97,67.26 8.24,67.26 BOT24.2 | 23.48,67.26 24.75,67.26 BOT25.2 | 39.88,67.26 41.15,67.26 BOT26.2 | 56.48,67.26 57.74,67.26 BOT27.2 | 72.88,67.26 74.14,67.26 BOT28.2 | 89.38,67.26 90.64,67.26 BOT29.2
  Top 0.254: 5.71,6.61 C1.2 7.25,3.53 BOT.2 9.52,3.8 11.42,3.8 12.05,3.17 12.05,1.9 12.69,1.26 15.23,1.26 | 5.71,6.61 5.71,6.54 | 15.23,1.26 15.23,7.61 14.6,8.24 RIGHT.2 | TOP.2 8.24,12.05 7.61,11.42 5.07,11.42 4.43,10.79 4.43,8.24 | LED1.VSS 5.71,7.18 | 5.71,7.18 5.5,7.18 4.43,8.24 | LEFT.2 4.43,8.24 | 5.71,6.61 5.71,7.18 | 6.97,1.26 1.26,1.26 | 22.2,6.61 C2.2 23.75,3.53 BOT1.2 26.02,3.8 27.92,3.8 28.55,3.17 28.55,1.9 29.19,1.26 31.73,1.26 | 22.2,6.61 22.2,6.54 | 31.73,1.26 31.73,7.61 31.09,8.24 RIGHT1.2 | TOP1.2 24.75,12.05 24.11,11.42 21.57,11.42 20.93,10.79 20.93,8.24 | LED2.VSS 22.2,7.18 | 22.2,7.18 22,7.18 20.93,8.24 | LEFT1.2 20.93,8.24 | 22.2,6.61 22.2,7.18 | 23.48,1.26 15.23,1.26 | 38.6,6.61 C3.2 40.15,3.53 BOT2.2 42.41,3.8 44.32,3.8 44.95,3.17 44.95,1.9 45.59,1.26 48.13,1.26 | 38.6,6.61 38.6,6.54 | 48.13,1.26 48.13,7.61 47.49,8.24 RIGHT2.2 | TOP2.2 41.15,12.05 40.51,11.42 37.97,11.42 37.34,10.79 37.34,8.24 | LED3.VSS 38.6,7.18 | 38.6,7.18 38.4,7.18 37.34,8.24 | LEFT2.2 37.34,8.24 | 38.6,6.61 38.6,7.18 | 39.88,1.26 31.73,1.26 | 55.2,6.61 C4.2 56.74,3.53 BOT3.2 59.02,3.8 60.92,3.8 61.55,3.17 61.55,1.9 62.19,1.26 64.73,1.26 | 55.2,6.61 55.2,6.54 | 64.73,1.26 64.73,7.61 64.09,8.24 RIGHT3.2 | TOP3.2 57.74,12.05 57.11,11.42 54.57,11.42 53.94,10.79 53.94,8.24 | LED4.VSS 55.2,7.18 | 55.2,7.18 55,7.18 53.94,8.24 | LEFT3.2 53.94,8.24 | 55.2,6.61 55.2,7.18 | 71.61,6.61 C5.2 73.14,3.53 BOT4.2 75.42,3.8 77.32,3.8 77.95,3.17 77.95,1.9 78.59,1.26 81.13,1.26 | 71.61,6.61 71.61,6.54 | 81.13,1.26 81.13,7.61 80.5,8.24 RIGHT4.2 | TOP4.2 74.14,12.05 73.51,11.42 70.97,11.42 70.33,10.79 70.33,8.24 | LED5.VSS 71.61,7.18
  Top 0.254: 71.61,7.18 71.4,7.18 70.33,8.24 | LEFT4.2 70.33,8.24 | 71.61,6.61 71.61,7.18 | 72.88,1.26 64.73,1.26 | 48.13,1.26 56.48,1.26 | 88.11,6.61 C6.2 89.64,3.53 BOT5.2 91.92,3.8 93.82,3.8 94.45,3.17 94.45,1.9 95.09,1.26 97.63,1.26 97.63,7.61 97,8.24 RIGHT5.2 | 88.11,6.61 88.11,6.54 | 86.83,8.24 86.83,10.79 87.47,11.42 90.01,11.42 90.64,12.05 TOP5.2 BOT11.2 | LED6.VSS 88.11,7.18 | 88.11,7.18 87.9,7.18 86.83,8.24 | LEFT5.2 86.83,8.24 | 88.11,6.61 88.11,7.18 | 81.13,1.26 89.38,1.26 | 5.71,23.11 C7.2 7.25,20.03 BOT6.2 9.52,20.3 11.42,20.3 12.05,19.66 12.05,18.39 12.69,17.76 15.23,17.76 | 5.71,23.11 5.71,23.05 | 15.23,17.76 15.23,24.11 14.6,24.75 RIGHT6.2 | TOP6.2 8.24,28.55 7.61,27.92 5.07,27.92 4.43,27.29 4.43,24.75 | LED7.VSS 5.71,23.68 | 5.71,23.68 5.5,23.68 4.43,24.75 | LEFT6.2 4.43,24.75 | 5.71,23.11 5.71,23.68 | 22.2,23.11 C8.2 23.75,20.03 BOT7.2 26.02,20.3 27.92,20.3 28.55,19.66 28.55,18.39 29.19,17.76 31.73,17.76 | 22.2,23.11 22.2,23.05 | 31.73,17.76 31.73,24.11 31.09,24.75 RIGHT7.2 | TOP7.2 24.75,28.55 24.11,27.92 21.57,27.92 20.93,27.29 20.93,24.75 | LED8.VSS 22.2,23.68 | 22.2,23.68 22,23.68 20.93,24.75 | LEFT7.2 20.93,24.75 | 22.2,23.11 22.2,23.68 | 23.48,17.76 15.23,17.76 | 38.6,23.11 C9.2 40.15,20.03 BOT8.2 42.41,20.3 44.32,20.3 44.95,19.66 44.95,18.39 45.59,17.76 48.13,17.76 | 38.6,23.11 38.6,23.05 | 48.13,17.76 48.13,24.11 47.49,24.75 RIGHT8.2 | TOP8.2 41.15,28.55 40.51,27.92 37.97,27.92 37.34,27.29 37.34,24.75 | LED9.VSS 38.6,23.68 | 38.6,23.68 38.4,23.68 37.34,24.75 | LEFT8.2 37.34,24.75 | 38.6,23.11 38.6,23.68 | 39.88,17.76 31.73,17.76 | 55.2,23.11 C10.2 56.74,20.03 BOT9.2 59.02,20.3 60.92,20.3 61.55,19.66 61.55,18.39 62.19,17.76 64.73,17.76
  Top 0.254: 55.2,23.11 55.2,23.05 | 64.73,17.76 64.73,24.11 64.09,24.75 RIGHT9.2 | TOP9.2 57.74,28.55 57.11,27.92 54.57,27.92 53.94,27.29 53.94,24.75 | LED10.VSS 55.2,23.68 | 55.2,23.68 55,23.68 53.94,24.75 | LEFT9.2 53.94,24.75 | 55.2,23.11 55.2,23.68 | 71.61,23.11 C11.2 73.14,20.03 BOT10.2 75.42,20.3 77.32,20.3 77.95,19.66 77.95,18.39 78.59,17.76 81.13,17.76 | 71.61,23.11 71.61,23.05 | 81.13,17.76 81.13,24.11 80.5,24.75 RIGHT10.2 | TOP10.2 74.14,28.55 73.51,27.92 70.97,27.92 70.33,27.29 70.33,24.75 | LED11.VSS 71.61,23.68 | 71.61,23.68 71.4,23.68 70.33,24.75 | LEFT10.2 70.33,24.75 | 71.61,23.11 71.61,23.68 | 72.88,17.76 64.73,17.76 | 48.13,17.76 56.48,17.76 | 88.11,23.11 C12.2 89.64,20.03 BOT11.2 | 88.11,23.11 88.11,23.05 | RIGHT11.2 97,24.75 97.63,24.11 97.63,17.76 95.09,17.76 94.45,18.39 94.45,19.66 93.82,20.3 91.92,20.3 BOT11.2 | 86.83,24.75 86.83,27.29 87.47,27.92 90.01,27.92 90.64,28.55 TOP11.2 90.64,34.26 | LED12.VSS 88.11,23.68 | 88.11,23.68 87.9,23.68 86.83,24.75 | LEFT11.2 86.83,24.75 | 88.11,23.11 88.11,23.68 | 81.13,17.76 89.38,17.76 | 5.71,39.61 C13.2 7.25,36.53 BOT12.2 9.52,36.8 11.42,36.8 12.05,36.16 12.05,34.9 12.69,34.26 15.23,34.26 | 5.71,39.61 5.71,39.55 | 15.23,34.26 15.23,40.61 14.6,41.24 RIGHT12.2 | TOP12.2 8.24,45.05 7.61,44.42 5.07,44.42 4.43,43.78 4.43,41.24 | LED13.VSS 5.71,40.18 | 5.71,40.18 5.5,40.18 4.43,41.24 | LEFT12.2 4.43,41.24 | 5.71,39.61 5.71,40.18 | 6.97,34.26 1.26,34.26 | 22.2,39.61 C14.2 23.75,36.53 BOT13.2 26.02,36.8 27.92,36.8 28.55,36.16 28.55,34.9 29.19,34.26 31.73,34.26 | 22.2,39.61 22.2,39.55 | 31.73,34.26 31.73,40.61 31.09,41.24 RIGHT13.2 | TOP13.2 24.75,45.05 24.11,44.42 21.57,44.42 20.93,43.78 20.93,41.24
  Top 0.254: LED14.VSS 22.2,40.18 | 22.2,40.18 22,40.18 20.93,41.24 | LEFT13.2 20.93,41.24 | 22.2,39.61 22.2,40.18 | 23.48,34.26 15.23,34.26 | 38.6,39.61 C15.2 40.15,36.53 BOT14.2 42.41,36.8 44.32,36.8 44.95,36.16 44.95,34.9 45.59,34.26 48.13,34.26 | 38.6,39.61 38.6,39.55 | 48.13,34.26 48.13,40.61 47.49,41.24 RIGHT14.2 | TOP14.2 41.15,45.05 40.51,44.42 37.97,44.42 37.34,43.78 37.34,41.24 | LED15.VSS 38.6,40.18 | 38.6,40.18 38.4,40.18 37.34,41.24 | LEFT14.2 37.34,41.24 | 38.6,39.61 38.6,40.18 | 39.88,34.26 31.73,34.26 | 55.2,39.61 C16.2 56.74,36.53 BOT15.2 59.02,36.8 60.92,36.8 61.55,36.16 61.55,34.9 62.19,34.26 64.73,34.26 | 55.2,39.61 55.2,39.55 | 64.73,34.26 64.73,40.61 64.09,41.24 RIGHT15.2 | TOP15.2 57.74,45.05 57.11,44.42 54.57,44.42 53.94,43.78 53.94,41.24 | LED16.VSS 55.2,40.18 | 55.2,40.18 55,40.18 53.94,41.24 | LEFT15.2 53.94,41.24 | 55.2,39.61 55.2,40.18 | 71.61,39.61 C17.2 73.14,36.53 BOT16.2 75.42,36.8 77.32,36.8 77.95,36.16 77.95,34.9 78.59,34.26 81.13,34.26 | 71.61,39.61 71.61,39.55 | 81.13,34.26 81.13,40.61 80.5,41.24 RIGHT16.2 | TOP16.2 74.14,45.05 73.51,44.42 70.97,44.42 70.33,43.78 70.33,41.24 | LED17.VSS 71.61,40.18 | 71.61,40.18 71.4,40.18 70.33,41.24 | LEFT16.2 70.33,41.24 | 71.61,39.61 71.61,40.18 | 72.88,34.26 64.73,34.26 | 48.13,34.26 56.48,34.26 | 88.11,39.61 C18.2 89.64,36.53 BOT17.2 91.92,36.8 93.82,36.8 94.45,36.16 94.45,34.9 95.09,34.26 97.63,34.26 97.63,40.61 97,41.24 RIGHT17.2 | 88.11,39.61 88.11,39.55 | 86.83,41.24 86.83,43.78 87.47,44.42 90.01,44.42 90.64,45.05 TOP17.2 BOT23.2 | LED18.VSS 88.11,40.18 | 88.11,40.18 87.9,40.18 86.83,41.24 | LEFT17.2 86.83,41.24 | 88.11,39.61 88.11,40.18
  Top 0.254: 81.13,34.26 89.38,34.26 | 5.71,56.11 C19.2 7.25,53.03 BOT18.2 9.52,53.3 11.42,53.3 12.05,52.66 12.05,51.4 12.69,50.76 15.23,50.76 | 5.71,56.11 5.71,56.05 | 15.23,50.76 15.23,57.11 14.6,57.74 RIGHT18.2 | TOP18.2 8.24,61.55 7.61,60.92 5.07,60.92 4.43,60.28 4.43,57.74 | LED19.VSS 5.71,56.68 | 5.71,56.68 5.5,56.68 4.43,57.74 | LEFT18.2 4.43,57.74 | 5.71,56.11 5.71,56.68 | 6.97,50.76 1.26,50.76 | 22.2,56.11 C20.2 23.75,53.03 BOT19.2 26.02,53.3 27.92,53.3 28.55,52.66 28.55,51.4 29.19,50.76 31.73,50.76 | 22.2,56.11 22.2,56.05 | 31.73,50.76 31.73,57.11 31.09,57.74 RIGHT19.2 | TOP19.2 24.75,61.55 24.11,60.92 21.57,60.92 20.93,60.28 20.93,57.74 | LED20.VSS 22.2,56.68 | 22.2,56.68 22,56.68 20.93,57.74 | LEFT19.2 20.93,57.74 | 22.2,56.11 22.2,56.68 | 23.48,50.76 15.23,50.76 | 38.6,56.11 C21.2 40.15,53.03 BOT20.2 42.41,53.3 44.32,53.3 44.95,52.66 44.95,51.4 45.59,50.76 48.13,50.76 | 38.6,56.11 38.6,56.05 | 48.13,50.76 48.13,57.11 47.49,57.74 RIGHT20.2 | TOP20.2 41.15,61.55 40.51,60.92 37.97,60.92 37.34,60.28 37.34,57.74 | LED21.VSS 38.6,56.68 | 38.6,56.68 38.4,56.68 37.34,57.74 | LEFT20.2 37.34,57.74 | 38.6,56.11 38.6,56.68 | 39.88,50.76 31.73,50.76 | 55.2,56.11 C22.2 56.74,53.03 BOT21.2 59.02,53.3 60.92,53.3 61.55,52.66 61.55,51.4 62.19,50.76 64.73,50.76 | 55.2,56.11 55.2,56.05 | 64.73,50.76 64.73,57.11 64.09,57.74 RIGHT21.2 | TOP21.2 57.74,61.55 57.11,60.92 54.57,60.92 53.94,60.28 53.94,57.74 | LED22.VSS 55.2,56.68 | 55.2,56.68 55,56.68 53.94,57.74 | LEFT21.2 53.94,57.74 | 55.2,56.11 55.2,56.68 | 71.61,56.11 C23.2 73.14,53.03 BOT22.2 75.42,53.3 77.32,53.3 77.95,52.66 77.95,51.4 78.59,50.76 81.13,50.76
  Top 0.254: 71.61,56.11 71.61,56.05 | 81.13,50.76 81.13,57.11 80.5,57.74 RIGHT22.2 | TOP22.2 74.14,61.55 73.51,60.92 70.97,60.92 70.33,60.28 70.33,57.74 | LED23.VSS 71.61,56.68 | 71.61,56.68 71.4,56.68 70.33,57.74 | LEFT22.2 70.33,57.74 | 71.61,56.11 71.61,56.68 | 72.88,50.76 64.73,50.76 | 48.13,50.76 56.48,50.76 | 88.11,56.11 C24.2 89.64,53.03 BOT23.2 | 88.11,56.11 88.11,56.05 | RIGHT23.2 97,57.74 97.63,57.11 97.63,50.76 95.09,50.76 94.45,51.4 94.45,52.66 93.82,53.3 91.92,53.3 BOT23.2 | 86.83,57.74 86.83,60.28 87.47,60.92 90.01,60.92 90.64,61.55 TOP23.2 BOT29.2 | LED24.VSS 88.11,56.68 | 88.11,56.68 87.9,56.68 86.83,57.74 | LEFT23.2 86.83,57.74 | 88.11,56.11 88.11,56.68 | 81.13,50.76 89.38,50.76 | 5.71,72.61 C25.2 7.25,69.53 BOT24.2 9.52,69.8 11.42,69.8 12.05,69.17 12.05,67.89 12.69,67.26 15.23,67.26 | 5.71,72.61 5.71,72.55 | 15.23,67.26 15.23,73.61 14.6,74.25 RIGHT24.2 | TOP24.2 8.24,78.06 7.61,77.42 5.07,77.42 4.43,76.78 4.43,74.25 | LED25.VSS 5.71,73.18 | 5.71,73.18 5.5,73.18 4.43,74.25 | LEFT24.2 4.43,74.25 | 5.71,72.61 5.71,73.18 | 6.97,67.26 1.26,67.26 | 22.2,72.61 C26.2 23.75,69.53 BOT25.2 26.02,69.8 27.92,69.8 28.55,69.17 28.55,67.89 29.19,67.26 31.73,67.26 | 22.2,72.61 22.2,72.55 | 31.73,67.26 31.73,73.61 31.09,74.25 RIGHT25.2 | TOP25.2 24.75,78.06 24.11,77.42 21.57,77.42 20.93,76.78 20.93,74.25 | LED26.VSS 22.2,73.18 | 22.2,73.18 22,73.18 20.93,74.25 | LEFT25.2 20.93,74.25 | 22.2,72.61 22.2,73.18 | 23.48,67.26 15.23,67.26 | 38.6,72.61 C27.2 40.15,69.53 BOT26.2 42.41,69.8 44.32,69.8 44.95,69.17 44.95,67.89 45.59,67.26 48.13,67.26 | 38.6,72.61 38.6,72.55 | 48.13,67.26 48.13,73.61 47.49,74.25 RIGHT26.2
  Top 0.254: TOP26.2 41.15,78.06 40.51,77.42 37.97,77.42 37.34,76.78 37.34,74.25 | LED27.VSS 38.6,73.18 | 38.6,73.18 38.4,73.18 37.34,74.25 | LEFT26.2 37.34,74.25 | 38.6,72.61 38.6,73.18 | 39.88,67.26 31.73,67.26 | 55.2,72.61 C28.2 56.74,69.53 BOT27.2 59.02,69.8 60.92,69.8 61.55,69.17 61.55,67.89 62.19,67.26 64.73,67.26 | 55.2,72.61 55.2,72.55 | 64.73,67.26 64.73,73.61 64.09,74.25 RIGHT27.2 | TOP27.2 57.74,78.06 57.11,77.42 54.57,77.42 53.94,76.78 53.94,74.25 | LED28.VSS 55.2,73.18 | 55.2,73.18 55,73.18 53.94,74.25 | LEFT27.2 53.94,74.25 | 55.2,72.61 55.2,73.18 | 71.61,72.61 C29.2 73.14,69.53 BOT28.2 75.42,69.8 77.32,69.8 77.95,69.17 77.95,67.89 78.59,67.26 81.13,67.26 | 71.61,72.61 71.61,72.55 | 81.13,67.26 81.13,73.61 80.5,74.25 RIGHT28.2 | TOP28.2 74.14,78.06 73.51,77.42 70.97,77.42 70.33,76.78 70.33,74.25 | LED29.VSS 71.61,73.18 | 71.61,73.18 71.4,73.18 70.33,74.25 | LEFT28.2 70.33,74.25 | 71.61,72.61 71.61,73.18 | 72.88,67.26 64.73,67.26 | 48.13,67.26 56.48,67.26 | 88.11,72.61 C30.2 89.64,69.53 BOT29.2 | 88.11,72.61 88.11,72.55 | RIGHT29.2 97,74.25 97.63,73.61 97.63,67.26 95.09,67.26 94.45,67.89 94.45,69.17 93.82,69.8 91.92,69.8 BOT29.2 | TOP29.2 90.64,78.06 90.01,77.42 87.47,77.42 86.83,76.78 86.83,74.25 | LED30.VSS 88.11,73.18 | 88.11,73.18 87.9,73.18 86.83,74.25 | LEFT29.2 86.83,74.25 | 88.11,72.61 88.11,73.18 | 81.13,67.26 89.38,67.26
  Bottom 0.254: U1.4 5.71,5.71 3.17,8.24 LEFT.2 | U2.4 22.2,5.71 19.66,8.24 LEFT1.2 | U3.4 38.6,5.71 36.06,8.24 LEFT2.2 | U4.4 55.2,5.71 52.66,8.24 LEFT3.2 | U5.4 71.61,5.71 69.06,8.24 LEFT4.2 | U6.4 88.11,5.71 85.56,8.24 LEFT5.2 | U7.4 5.71,22.2 3.17,24.75 LEFT6.2 | U8.4 22.2,22.2 19.66,24.75 LEFT7.2 | U9.4 38.6,22.2 36.06,24.75 LEFT8.2 | U10.4 55.2,22.2 52.66,24.75 LEFT9.2 | U11.4 71.61,22.2 69.06,24.75 LEFT10.2 | U12.4 88.11,22.2 85.56,24.75 LEFT11.2 | U13.4 5.71,38.7 3.17,41.24 LEFT12.2 | U14.4 22.2,38.7 19.66,41.24 LEFT13.2 | U15.4 38.6,38.7 36.06,41.24 LEFT14.2 | U16.4 55.2,38.7 52.66,41.24 LEFT15.2 | U17.4 71.61,38.7 69.06,41.24 LEFT16.2 | U18.4 88.11,38.7 85.56,41.24 LEFT17.2 | U19.4 5.71,55.2 3.17,57.74 LEFT18.2 | U20.4 22.2,55.2 19.66,57.74 LEFT19.2 | U21.4 38.6,55.2 36.06,57.74 LEFT20.2 | U22.4 55.2,55.2 52.66,57.74 LEFT21.2 | U23.4 71.61,55.2 69.06,57.74 LEFT22.2 | U24.4 88.11,55.2 85.56,57.74 LEFT23.2 | U25.4 5.71,71.7 3.17,74.25 LEFT24.2 | U26.4 22.2,71.7 19.66,74.25 LEFT25.2 | U27.4 38.6,71.7 36.06,74.25 LEFT26.2 | U28.4 55.2,71.7 52.66,74.25 LEFT27.2 | U29.4 71.61,71.7 69.06,74.25 LEFT28.2 | U30.4 88.11,71.7 85.56,74.25 LEFT29.2
MI  (via drill 0.36)
  Top 0.254: MI.1 12.69,15.23 v9.52,15.23
  Bottom 0.254: U1.6 6.97,14.78 7.42,15.23 v9.52,15.23
MI1  (via drill 0.36)
  Top 0.254: MI1.1 29.19,15.23 v26.02,15.23
  Bottom 0.254: U2.6 23.48,14.78 23.92,15.23 v26.02,15.23
MI2  (via drill 0.36)
  Top 0.254: MI2.1 45.59,15.23 v42.41,15.23
  Bottom 0.254: U3.6 39.88,14.78 40.32,15.23 v42.41,15.23
MI3  (via drill 0.36)
  Top 0.254: MI3.1 62.19,15.23 v59.02,15.23
  Bottom 0.254: U4.6 56.48,14.78 56.92,15.23 v59.02,15.23
MI4  (via drill 0.36)
  Top 0.254: MI4.1 78.59,15.23 v75.42,15.23
  Bottom 0.254: U5.6 72.88,14.78 73.32,15.23 v75.42,15.23
MI5  (via drill 0.36)
  Top 0.254: MI5.1 95.09,15.23 v91.92,15.23
  Bottom 0.254: U6.6 89.38,14.78 89.82,15.23 v91.92,15.23
MI6  (via drill 0.36)
  Top 0.254: MI6.1 12.69,31.73 v9.52,31.73
  Bottom 0.254: U7.6 6.97,31.28 7.42,31.73 v9.52,31.73
MI7  (via drill 0.36)
  Top 0.254: MI7.1 29.19,31.73 v26.02,31.73
  Bottom 0.254: U8.6 23.48,31.28 23.92,31.73 v26.02,31.73
MI8  (via drill 0.36)
  Top 0.254: MI8.1 45.59,31.73 v42.41,31.73
  Bottom 0.254: U9.6 39.88,31.28 40.32,31.73 v42.41,31.73
MI9  (via drill 0.36)
  Top 0.254: MI9.1 62.19,31.73 v59.02,31.73
  Bottom 0.254: U10.6 56.48,31.28 56.92,31.73 v59.02,31.73
MI10  (via drill 0.36)
  Top 0.254: MI10.1 78.59,31.73 v75.42,31.73
  Bottom 0.254: U11.6 72.88,31.28 73.32,31.73 v75.42,31.73
MI11  (via drill 0.36)
  Top 0.254: MI11.1 95.09,31.73 v91.92,31.73
  Bottom 0.254: U12.6 89.38,31.28 89.82,31.73 v91.92,31.73
MI12  (via drill 0.36)
  Top 0.254: MI12.1 12.69,48.23 v9.52,48.23